# Altium PCB 2021.PcbDoc
Units mm, origin at the board's own origin, x right, y up, seen from the top; angles counter-clockwise.
Board outline 152.4 x 101.6 mm, 2 copper layers (Top Layer, Bottom Layer); 50 components, 31 nets, 124 pads, 3 vias.
Unrouted connection lines stored in the file: 58.
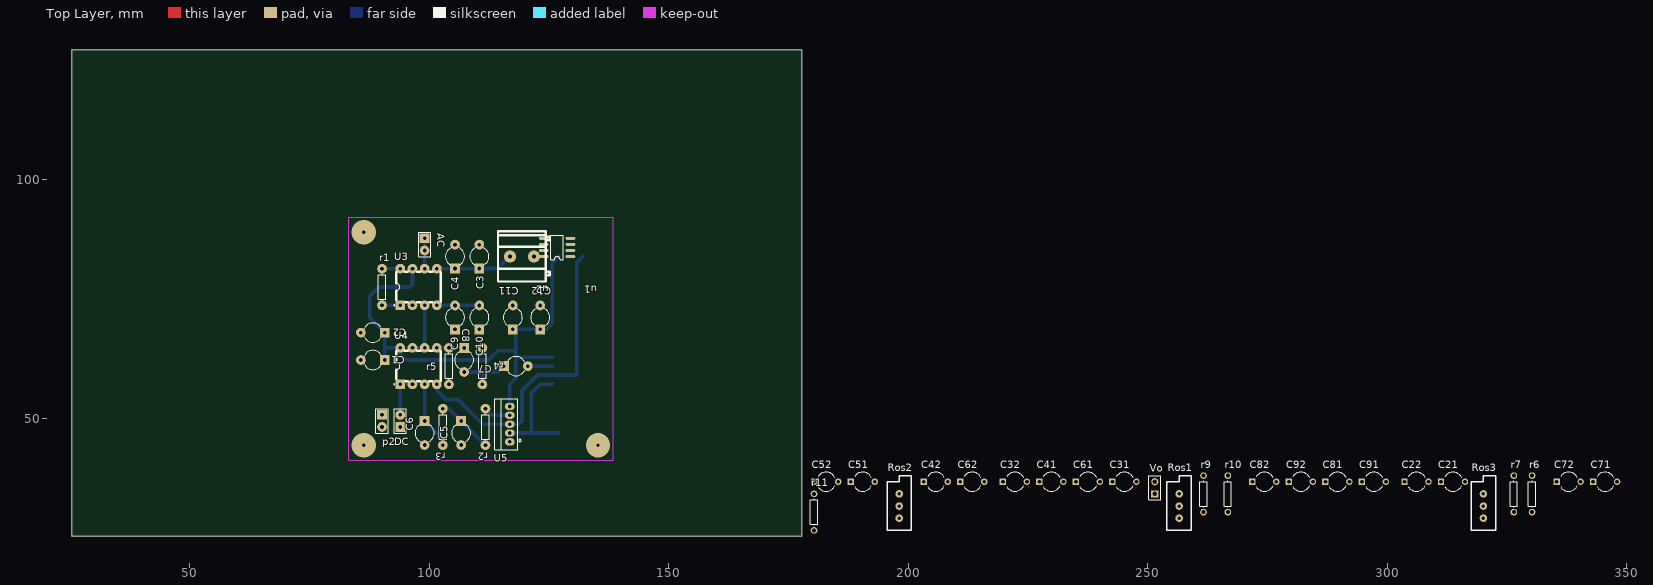
[diagram p0: Top Layer view]
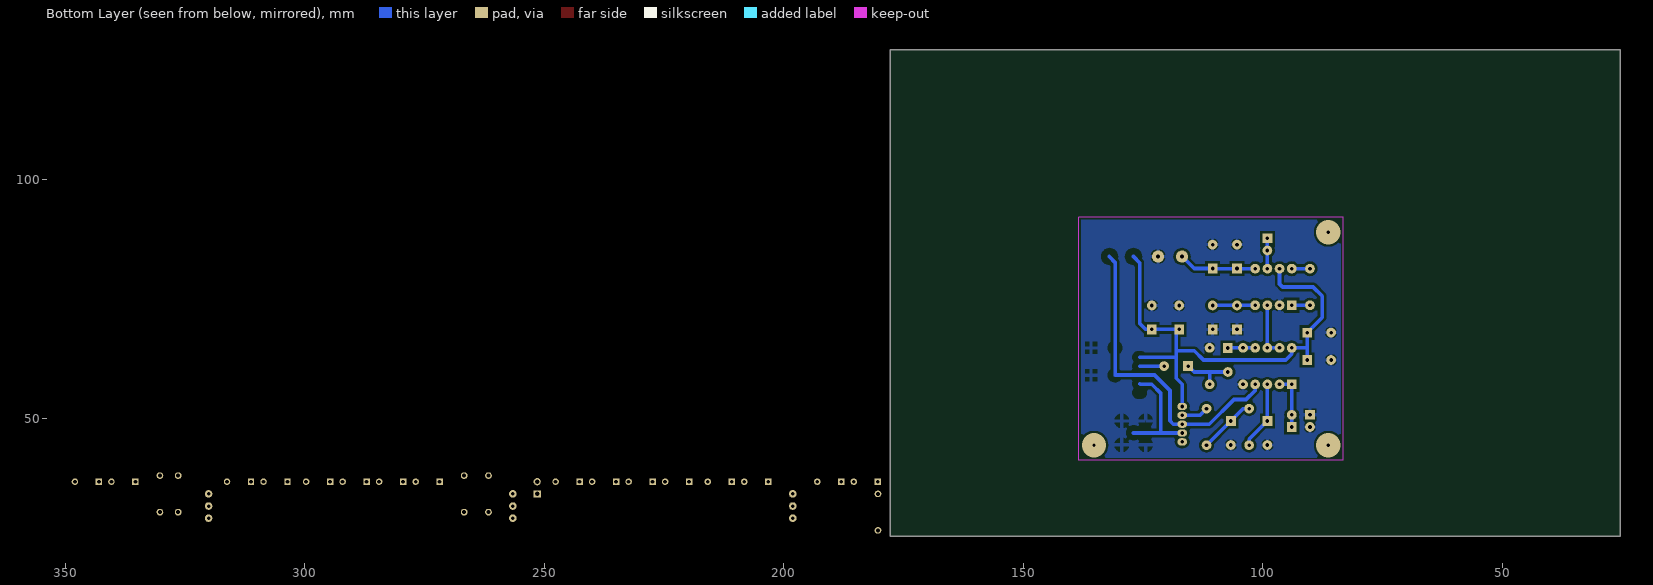
[diagram p1: Bottom Layer view, seen from below]

## Layer stack, top to bottom
Top Layer: signal copper 0.0356
Dielectric: dielectric 0.32, FR-4, Dk 4.8
Bottom Layer: signal copper 0.0356

## Board outline
25.4,25.4 177.8,25.4 177.8,127 25.4,127

## Design rules (kind name [scope] priority, off if disabled: settings)
Clearance [All] p1: gap=0.508
MinimumSolderMaskSliver [All] p1 off: minsoldermaskwidth=0.254
PolygonConnect [All] p1: connectstyle=Relief reliefconductorwidth=0.762 reliefentries=4 polygonreliefangle="90 Angle"
RoutingVias [All] p1: holewidth=0.711 width=1.27 viastyle="Through Hole" minholewidth=0.711 minwidth=1.27 maxholewidth=0.711 maxwidth=1.27
ShortCircuit [All] p1 off: allowed=FALSE
SilkscreenOverComponentPads [IsPad] p1 off: minsilkscreentomaskgap=0.254
SolderMaskExpansion [All] p1: expansion=0.102
TestPointUsage [All] p1: valid=0 allowmultiple=FALSE
Testpoint [All] p1: side=3 testpointundercomponent=TRUE minsize=1.016 maxsize=2.54 preferedsize=1.524 minholesize=0 maxholesize=1.016 preferedholesize=0.813 testpointgrid=0.025 style=297 order=0-112345678
Width [All] p1: maxlimit=1.27 minlimit=0.762 preferedwidth=0.762
21 further rules are at their usual default settings.

## Classes and differential pairs
component class TPS5403: C1 C2 C3 C4 D1 L P2 R1 R2 R3 U1
component class 2021: AC C5 C6 C7 C8 C9 C10 C11 C12 C21 C22 C31 C32 C41 C42 C51 C52 C61 C62 C71 C72 C81 C82 C91 C92 DC r2 r3 r4 r5 r6 r7 r11 Ros1 Ros2 Ros3 u2 U3 U4 U5 Vo

## Components (designator, comment, footprint, x,y, rotation, side; value= is the part's Value field where it differs from the comment)
AC "Header 2" HDR1X2#1 99.06,87.63 r270 top
C1 "Cap" CAPR5-4X5#1 88.265,62.23 r180 top
C2 "Cap" CAPR5-4X5#1 88.265,67.945 r180 top
C3 "Cap" CAPR5-4X5#1 110.49,83.82 r90 top
C4 "Cap Pol1" CAPR5-4X5#1 105.41,83.82 r90 top
C5 "Cap2" CAPR5-4X5#1 106.68,46.99 r270 top
C6 "Cap2" CAPR5-4X5#1 99.06,46.99 r270 top
C7 "Cap2" CAPR5-4X5#1 118.11,60.96 r0 top
C8 "Cap2" CAPR5-4X5#1 107.315,62.23 r270 top
C9 "Cap2" CAPR5-4X5#1 105.41,71.12 r90 top
C10 "Cap2" CAPR5-4X5#1 110.49,71.12 r90 top
C11 "Cap2" CAPR5-4X5#1 117.475,71.12 r90 top
C12 "Cap2" CAPR5-4X5#1 123.19,71.12 r90 top
C21 "Cap2" CAPR5-4X5#2 313.69,36.83 r0 top
C22 "Cap2" CAPR5-4X5#2 306.07,36.83 r0 top
C31 "Cap2" CAPR5-4X5#2 245.11,36.83 r0 top
C32 "Cap2" CAPR5-4X5#2 222.25,36.83 r0 top
C41 "Cap2" CAPR5-4X5#2 229.87,36.83 r0 top
C42 "Cap2" CAPR5-4X5#2 205.74,36.83 r0 top
C51 "Cap2" CAPR5-4X5#2 190.5,36.83 r0 top
C52 "Cap2" CAPR5-4X5#2 182.88,36.83 r0 top
C61 "Cap2" CAPR5-4X5#2 237.49,36.83 r0 top
C62 "Cap2" CAPR5-4X5#2 213.36,36.83 r0 top
C71 "Cap2" CAPR5-4X5#2 345.44,36.83 r0 top
C72 "Cap2" CAPR5-4X5#2 337.82,36.83 r0 top
C81 "Cap2" CAPR5-4X5#2 289.56,36.83 r0 top
C82 "Cap2" CAPR5-4X5#2 274.32,36.83 r0 top
C91 "Cap2" CAPR5-4X5#2 297.18,36.83 r0 top
C92 "Cap2" CAPR5-4X5#2 281.94,36.83 r0 top
DC "Header 2" HDR1X2#1 93.98,48.26 r90 top
p2 "ENABLE" HDR1X2#1 90.17,50.8 r270 top
r1 "Res2" AXIAL-0.3#1 90.17,77.47 r90 top
r2 "Res2" AXIAL-0.3#1 111.76,48.26 r270 top
r3 "Res2" AXIAL-0.3#1 102.87,48.26 r270 top
r4 "Res1" AXIAL-0.3#1 111.125,60.96 r90 top
r5 "Res1" AXIAL-0.3#1 104.14,60.96 r270 top
r6 "Res1" AXIAL-0.3#2 330.2,34.29 r90 top
r7 "Res1" AXIAL-0.3#2 326.39,34.29 r90 top
r9 "Res1" AXIAL-0.3#2 261.62,34.29 r90 top
r10 "Res1" AXIAL-0.3#2 266.7,34.29 r90 top
r11 "Res1" AXIAL-0.3#2 180.34,30.48 r90 top
Ros1 "POT1" VR5 256.54,29.21 r90 top
Ros2 "POT2" VR5 198.12,29.21 r90 top
Ros3 "POT1" VR5 320.04,29.21 r90 top
u1 "TPS5430" SO-8 129.5,83.82 r180 top
u2 "KF128-5.0-2P" CONN-TH_P5.00_KF128-5.0-2P 119.38,83.82 r180 top
U3 "AD620ANZ" DIP-8_L9.3-W6.4-P2.54-LS7.6-BL 97.79,77.47 r0 top
U4 "opa2727" DIP-8_L9.3-W6.4-P2.54-LS7.6-BL 97.79,60.96 r0 top
U5 "opa2727" TO-220-5L_L10.2-W4.5-P1.71-L 116.84,48.84 r90 top
Vo "Header 2" HDR1X2#2 251.46,34.29 r90 top

## Footprints (in the part's own frame and the unit in brackets; to place one, negate y for a bottom-side part, rotate by r counter-clockwise, add the part's x,y. Pads: shape width x height; smd on the part's side, far side on the other; paste and mask are expansions set on the pad)
AXIAL-0.3#1 [mil] "Resistor; 2 Leads"
  round 80 hole 30: 1(-150,0) 2(150,0)
  silkscreen extent -109,-30 109,30
AXIAL-0.3#2 [mil] "Resistor; 2 Leads"
  round 55.12 hole 33.46: 1(-150,0) 2(150,0)
  silkscreen extent -109,-30 109,30
CAPR5-4X5#1 [mil] "Capacitor; 2 Leads"
  rect 80x80 hole 30: 1(-98.43,0)
  round 80 hole 30: 2(98.43,0)
  silkscreen extent -66,-79 72,79
CAPR5-4X5#2 [mil] "Capacitor; 2 Leads"
  rect 53.15x53.15 hole 31.5: 1(-98.43,0)
  round 53.15 hole 31.5: 2(98.43,0)
  silkscreen extent -66,-79 72,79
CONN-TH_P5.00_KF128-5.0-2P [mm]
  round 2.54 hole 0.813: 1(-2.5,0) 2(2.5,0)
  silkscreen extent -5.76,-5.3 5,5.2
DIP-8_L9.3-W6.4-P2.54-LS7.6-BL [mil]
  rect 80x80 hole 30: 1(-150,-150)
  round 80 hole 30: 2(-50,-150) 3(50,-150) 4(150,-150) 5(150,150) 6(50,150) 7(-50,150) 8(-150,150)
  silkscreen extent -204,-154 183,126
HDR1X2#1 [mil] "Connector; Header; 2 Position"
  rect 80x80 hole 30: 1(0,0)
  round 80 hole 30: 2(100,0)
  silkscreen extent -50,-50 150,50
HDR1X2#2 [mil] "Connector; Header; 2 Position"
  rect 59.06x59.06 hole 35.43: 1(0,0)
  round 59.06 hole 35.43: 2(100,0)
  silkscreen extent -50,-50 150,50
SO-8 [mil]
  oval 80x24 smd: 1(0,0) 2(0,-50) 3(0,-100) 4(0,-150) 5(220,-150) 6(220,-100) 7(220,-50) 8(220,0)
  silkscreen extent 60,-175 160,25
TO-220-5L_L10.2-W4.5-P1.71-L [mil]
  oval 60x80 hole 30: 1(-145.67,0) 2(-72.84,0) 3(0,0) 4(72.84,0) 5(145.67,0)
  silkscreen extent -209,-93 209,125
VR5 [mil]
  round 62 hole 28: 1(0,0) 2(200,0) 3(100,0)
  silkscreen extent -100,-100 350,100

## Part data
AC DC Vo: "Header, 2-Pin"
C1 C2 C3 C4: library part Cap2, "Capacitor"
C5 C6 C7 C8 C9 C10 C11 C12 C21 C22 C31 C32 C41 C42 C51 C52 C61 C62 C71 C72 C81 C82 C91 C92: "Capacitor"
p2: library part "Header 2", "Header, 2-Pin"
r1 r2 r3: library part Res1, "Resistor"
r4 r5 r6 r7 r9 r10 r11: "Resistor"
Ros1 Ros3: "Potentiometer"
Ros2: library part POT1, "Potentiometer"
u1: library part TPS5403, "TPS5403"
U4: library part AD620ANZ
U5: library part LM2596T-12_C194353

## Via types
v1: diameter 5.08, hole 0.711, Top Layer to Bottom Layer, 3 vias

## Nets (pads, with @x,y where several pads share a name; then routed paths per layer and width w, separated by ;. In a path a pad name is that pad's centre, name@x,y a point inside that pad or via, vN(x,y) a via of type N, cw(c..) or ccw(c..) an arc to the next point about the centre after c; other vN are vias at no path point)
+5: C11.1 C12.1 C21.1 C22.1 C41.2 C42.2 C71.1 C72.1 C91.1 C92.1 Ros1.3 Ros2.3 Ros3.3 U3.7 U4.7
-5: C9.1 C10.1 C31.1 C32.1 C51.1 C52.1 C81.1 C82.1 U4.4 U5.5
-5v: C61.1 C62.1 U3.4 | length 75.6
  Bottom Layer w0.762: 101.6,57.15 101.6,55.88 103.505,53.975 106.045,53.975 111.18,48.84 116.84,48.84 118.69,48.84 119.38,49.53 119.38,55.88 122.61,59.11 125.73,59.11 130.755,59.11 130.81,59.055 130.85,59.095 130.85,64.77 130.85,82.59 132.08,83.82 ; U3.4 110.49,73.66
GND: C1.1 C5.2 C6.2 C9.2 C10.2 C11.2 C12.2 C21.2 C22.2 C31.2 C32.2 C41.1 C42.1 C51.2 C52.2 C61.2 C62.2 C71.2 C72.2 C81.2 C82.2 C91.2 C92.2 r4.2 r5.2 r7.1 U3.2
NetAC_1: AC.1 AC.2 U3.3 U4.6
NetC1_2: C1.2 C2.2 u1.7
NetC2_1: C2.1 C4.2 p2.2 r3.1 u1.6
NetC3_1: C3.1 u1.8 | length 16.3
  Bottom Layer w0.762: 101.6,81.28 C3.1@110.49,81.28 ; C3.1 114.34,81.32 116.84,83.82
NetC3_2: C3.2 u1.1
NetC4_1: C4.1 r1.2
NetC5_1: C5.1 r9.2 r10.1 | length 12
  Bottom Layer w0.762: 102.87,52.07 104.14,52.07 111.76,44.45
NetC6_1: C6.1 r10.2 U4.3 | length 14.3
  Bottom Layer w0.762: U4.3 99.06,49.53 102.87,45.72 102.87,44.45
NetC7_1: C7.1 C8.2 r4.1 | length 11.3
  Bottom Layer w0.762: C8.2 114.34,59.73 C7.1@115.57,60.96 ; r4.1 111.125,59.69
NetC7_2: C7.2 r9.1 u2.1 u2.2 | length 5.1
  Bottom Layer w0.762: C7.2@120.65,60.96 125.73,60.96
NetC8_1: C8.1 r5.1 U5.3 | length 5.7
  Bottom Layer w0.762: 101.6,64.77 C8.1@107.315,64.77
NetDC_1: DC.1 DC.2
NetP2_1: p2.1 u1.5
Netr1_1: r1.1 r2.2 | length 3.8
  Bottom Layer w0.762: r1.1 93.98,73.66
Netr2_1: r2.1 r3.2 u1.4 | length 5.7
  Bottom Layer w0.762: r2.1 113.14,50.69 116.84,50.69
Netr6_1: r6.1 r7.2
Netr11_1: r11.1 U3.8
Netr11_2: r11.2 U3.1
NetRos1_1: Ros1.1 U4.1
NetRos1_2: Ros1.2 U4.8
NetRos2_1: Ros2.1 U5.1
NetRos2_2: Ros2.2
NetRos3_1: Ros3.1
NetRos3_2: Ros3.2
NetU3_6: U3.6 Vo.1 Vo.2
VCC: r6.2
VREF: U3.5
pads on no net: u1.2 u1.3 U4.2 U4.5 U5.2 U5.4
copper on no net: | length 161.8
  Bottom Layer w0.762: 90.17,81.28 93.98,81.28 ; 90.765,62.23 90.765,64.77 ; 93.98,48.26 93.98,50.8 93.98,57.15 96.52,57.15 ; 96.52,64.77 99.06,64.77 99.06,73.66 ; 96.52,81.28 96.52,78.105 95.885,77.47 89.535,77.47 87.63,75.565 87.63,71.12 90.805,67.945 90.765,67.905 90.765,64.77 ; 99.06,81.28 99.06,85.09 99.06,87.63 ; 116.84,46.99 121.285,46.99 ; 116.84,52.54 116.84,57.15 118.11,58.42 118.11,62.865 ; 117.515,68.62 123.19,68.62 124.46,68.62 125.73,69.89 125.73,82.55 127,83.82 ; 118.11,68.58 118.11,64.135 ; 125.73,57.26 125.62,57.15 123.19,57.15 121.285,55.245 121.285,46.99 ; 125.73,62.81 118.165,62.81 118.11,62.865 ; 127,46.99 121.285,46.99 ; 90.765,64.77 93.98,64.77 93.98,63.5 95.25,62.23 112.395,62.23 114.3,64.135 118.11,64.135 ; 118.11,62.865 118.11,64.135
  other v1: 86.36,44.45 135.255,44.45 86.36,88.9

## Polygon pours and split planes (outlines as drawn)
GND on Bottom Layer "Top Layer-No Net" (solid, remove dead copper, pour order 0): 83.185,92.075 138.43,92.075 138.43,41.275 83.185,41.275

## Keep-outs
Keep-Out Layer:
  lines w0.1: 83.185,41.275 83.185,92.075 138.43,92.075 138.43,41.275 83.185,41.275